# Allegro board 1400916.brd
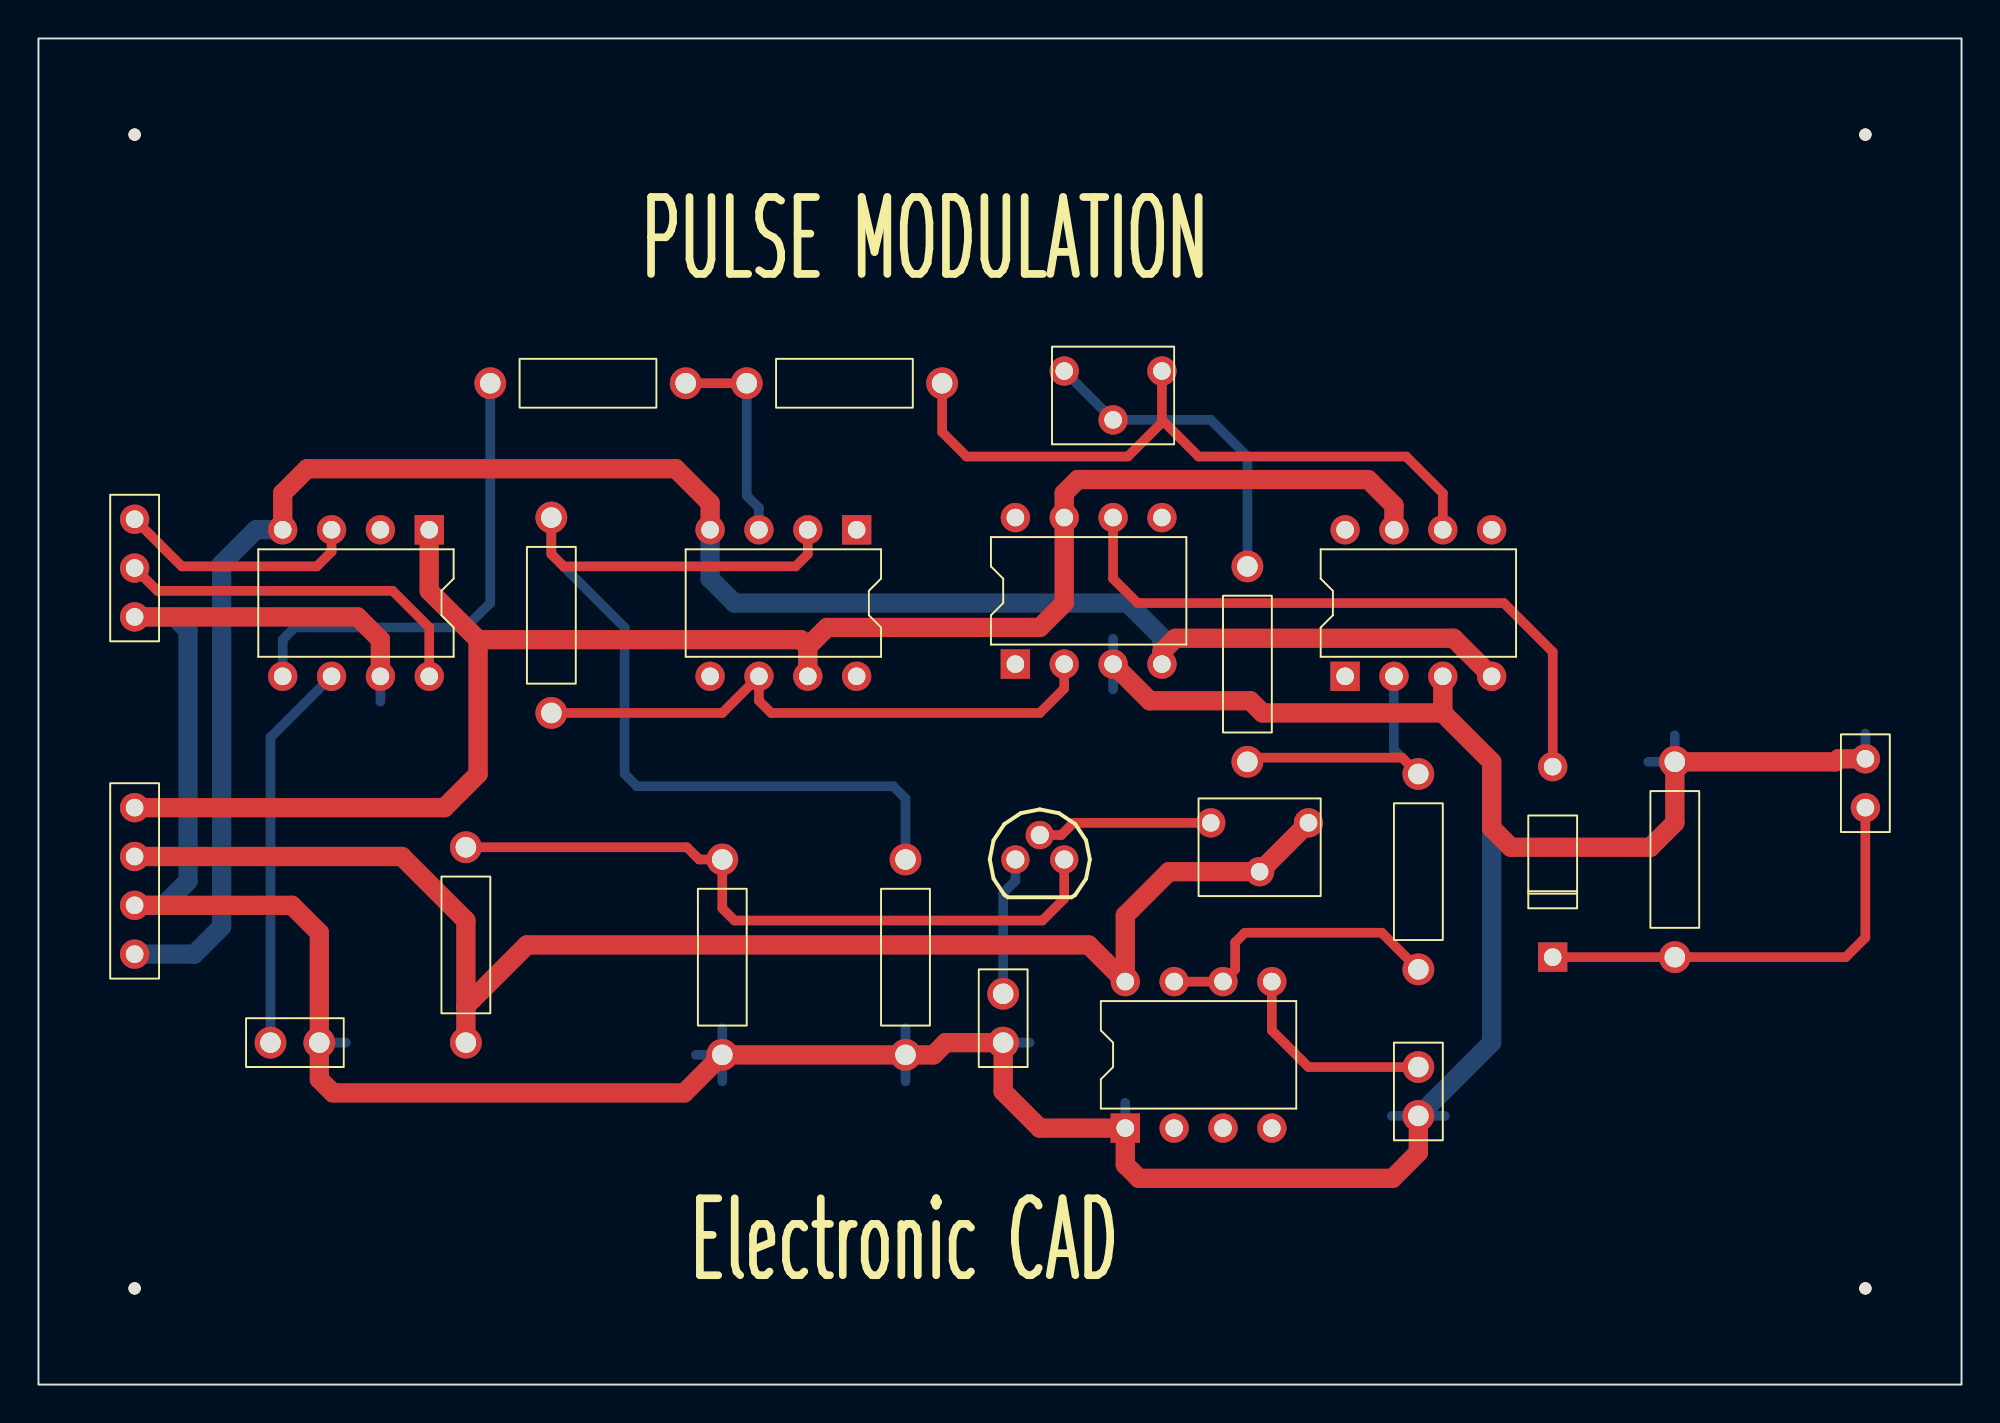
[diagram p0: board, top side]
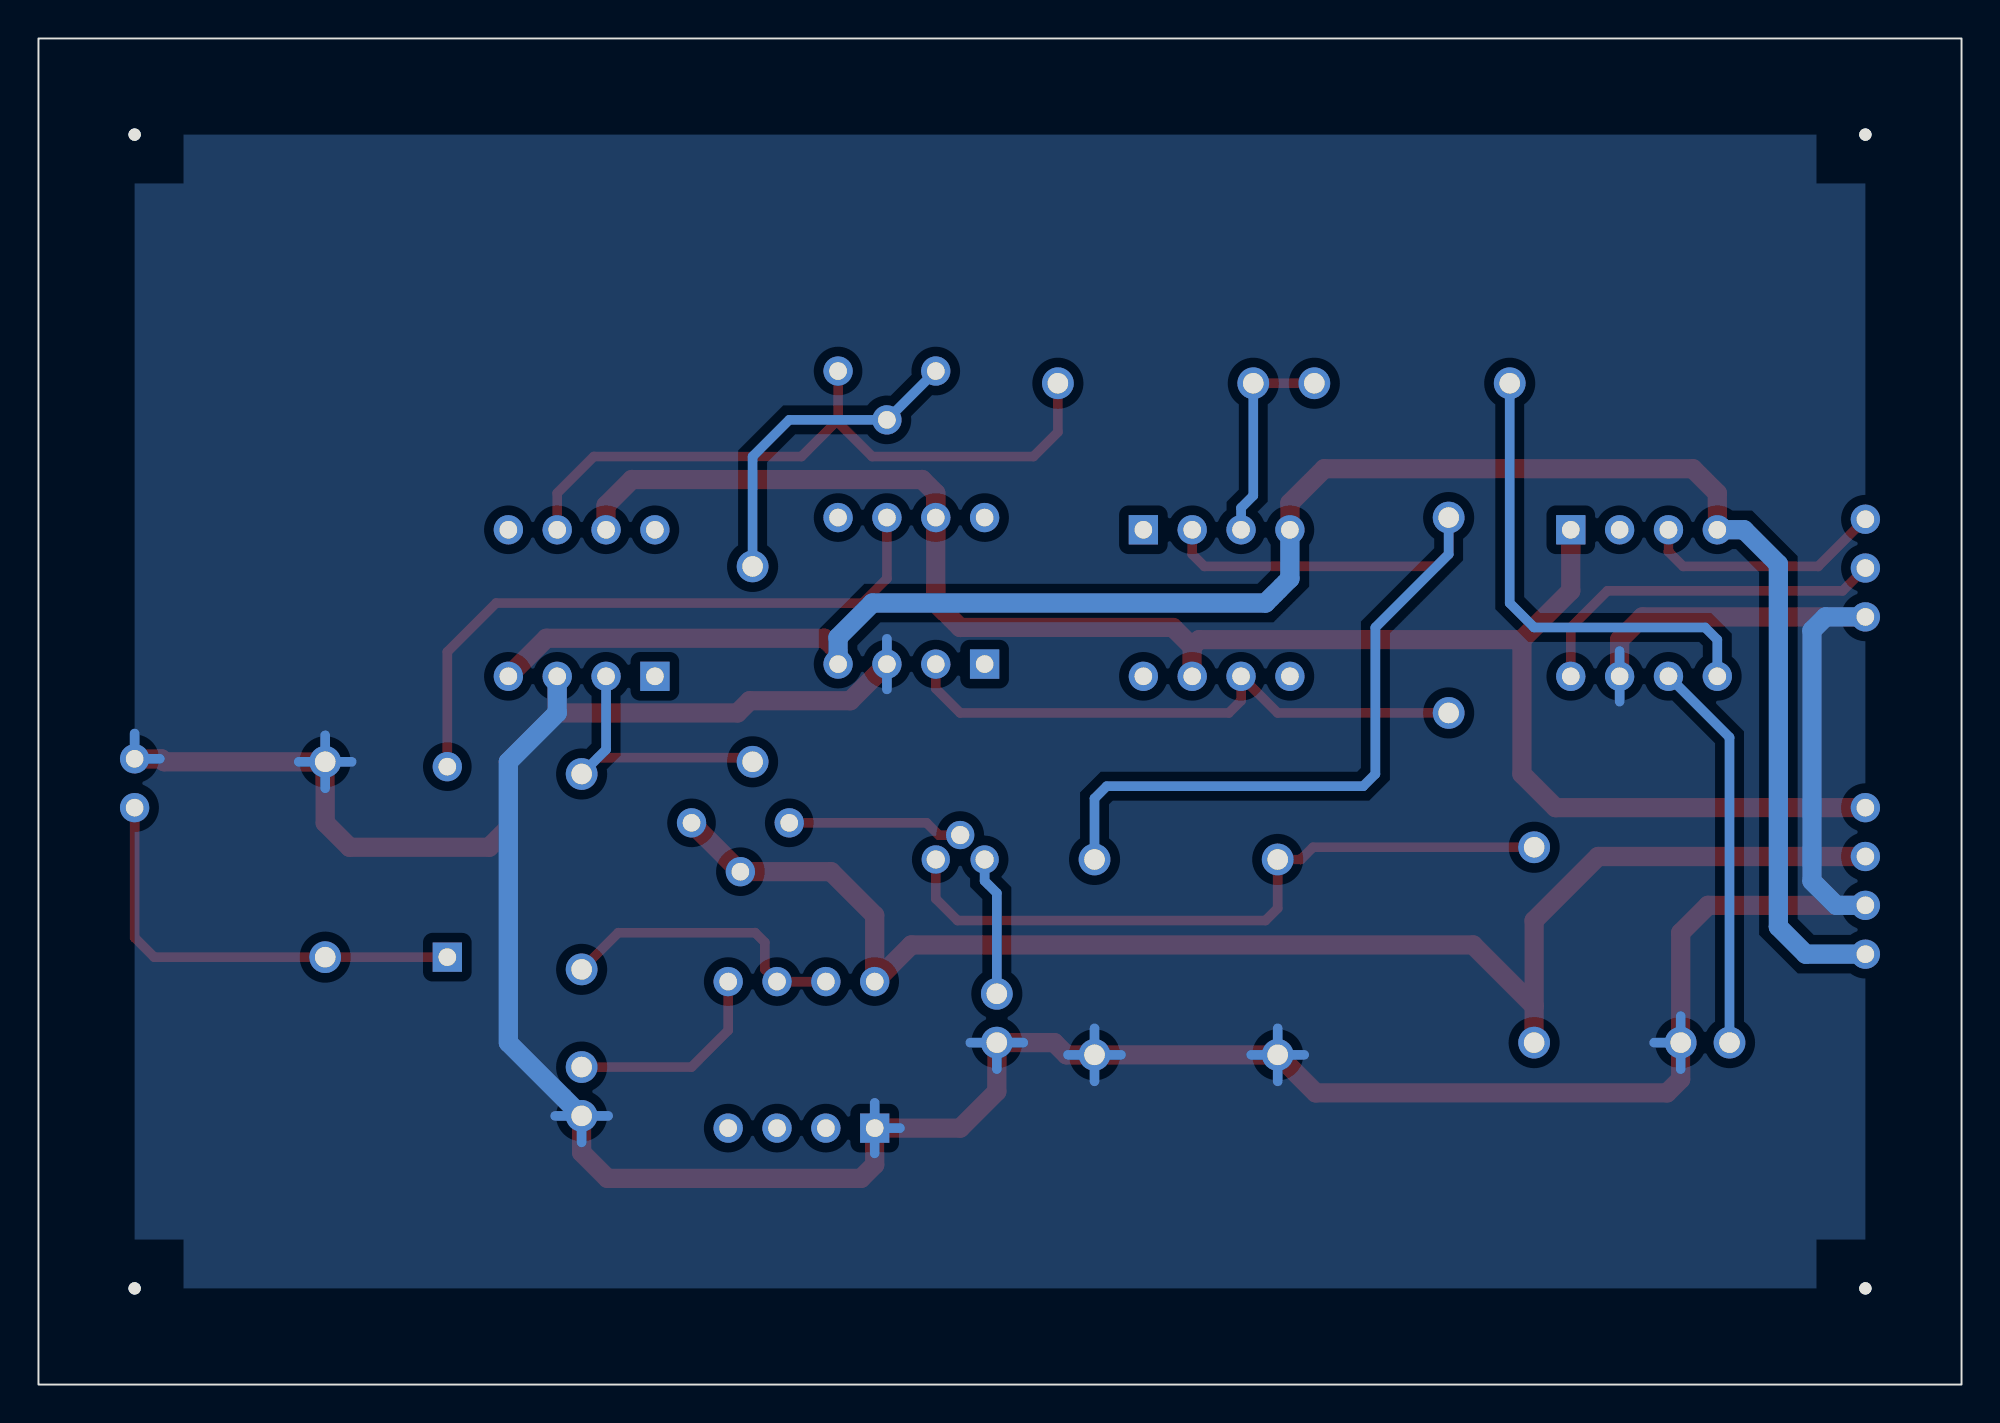
[diagram p1: board, bottom side, seen from below]

Outline 100 x 70 mm; copper layers: TOP, BOTTOM. Coordinates in mm from the lower left corner of the outline.
Outline path: rectangle 0,0 100,70

## Design rules (mm)
constraint set DEFAULT: min track width 0.5

## Placement (name value [footprint] x y rotation side)
C1  0.01uF  [CAPCK05]  50.16 20.32 180 top
C2  0.01uF  [CAPCK05]  71.75 16.51 180 top
C3  0.01uF  [CAPCK05]  12.06 17.78 270 top
D1  1S1588  [DO41]  78.74 22.23 0 top
J1  CON4  [JUMPER4]  5 30 270 top
J2  CON3  [JUMPER3]  5 45 270 top
J3  CON2  [JUMPER2]  95 30 90 top
NOREF  -  [unnamed]  95 5 0 top
NOREF#2  -  [unnamed]  5 65 0 top
NOREF#3  -  [unnamed]  5 5 0 top
NOREF#4  -  [unnamed]  95 65 0 top
Q1  2SA1015  [TO226AB]  50.8 27.3 0 top
R1  560  [RES400]  62.87 32.38 0 top
R2  39K  [RES400]  22.23 27.94 180 top
R3  6.2K  [RES400]  71.75 31.75 180 top
R4  100K  [RES400]  35.56 27.3 180 top
R5  10K  [RES400]  46.99 52.07 90 top
R6  10K  [RES400]  26.67 45.09 180 top
R7  10K  [RES400]  23.5 52.07 270 top
R8  10K  [RES400]  45.09 17.14 0 top
R9  10K  [RES400]  85.09 32.38 180 top
U1  NE555  [DIP8_3]  56.52 13.34 90 top
U2  LF356  [DIP8_3]  67.94 36.83 90 top
U3  LF398  [DIP8_3]  20.32 44.45 270 top
U4  LF356  [DIP8_3]  42.55 44.45 270 top
U5  LF356  [DIP8_3]  50.8 37.47 90 top
VR1  5K  [RESADJ]  60.96 29.21 90 top
VR2  20K  [RESADJ]  53.34 52.7 90 top

## Library data of the parts
C1-C3 = CAP NP: Tolerance: ***; User Part Number: ***
D1 = DIODE
J1 = CON4: User Part Number: ***
J2 = CON3: User Part Number: ***
J3 = CON2: User Part Number: ***
Q1 = 2SA1020
R1-R9 = R: Tolerance: ***; User Part Number: ***
U1 = NE555_2: Tolerance: ***; User Part Number: ***
U2 U4 U5 = LF356_4: Tolerance: ***; User Part Number: ***
U3 = LF356_3: Tolerance: ***; User Part Number: ***
VR1 VR2 = POT: Tolerance: ***; User Part Number: ***

## Footprints (pads in the part's own frame, mm; a bottom-side part is the same pattern mirrored in y, then rotated)
CAPCK05
  round 1.651 hole 1.067: 1(0,0) 2(0,2.54)
DIP8_3
  rect 1.524x1.524 hole 0.914: 1(0,0)
  round 1.524 hole 0.914: 2(0,-2.54) 3(0,-5.08) 4(0,-7.62) 5(7.62,-7.62) 6(7.62,-5.08) 7(7.62,-2.54) 8(7.62,0)
DO41
  rect 1.524x1.524 hole 0.914: 1(0,0)
  round 1.524 hole 0.914: 2(0,9.906)
JUMPER2
  round 1.524 hole 0.914: 1(0,0) 2(2.54,0)
JUMPER3
  round 1.524 hole 0.914: 1(0,0) 2(2.54,0) 3(5.08,0)
JUMPER4
  round 1.524 hole 0.914: 1(0,0) 2(2.54,0) 3(5.08,0) 4(7.62,0)
RES400
  round 1.651 hole 1.067: 1(0,0) 2(0,10.16)
RESADJ
  round 1.524 hole 0.914: 1(0,0) 2(-2.54,-2.54) 3(0,-5.08)
TO226AB
  round 1.473 hole 0.94: 1(0,0) 2(1.27,1.27) 3(2.54,0)
unnamed
  round 0.635 hole 3.175 unplated: (0,0)

## Nets
+5V: J1.2 R2.2 U1.8(VCC) VR1.2(WIPER) VR1.3
+15V: J1.1 U2.7 U3.1 U4.7 U5.7
-15V: J1.4 U2.4(V-) U3.4(V-) U4.4(V-) U5.4(V-)
GND: C1.2 C2.2 C3.2 J1.3 J2.3 J3.2 R4.2 R8.1 R9.1 U1.1 U2.3 U3.7 U5.3
CLOCK: U1.2
SIG_1: R5.1 U2.6 VR2.3
N00908: Q1.3 R2.1 R4.1
N00957: R3.2 U1.6 U1.7
N01010: C1.1 Q1.1(E)
N01067: C2.1 U1.5
N01446: R1.1 R3.1 U2.2
N01463: R1.2 VR2.1 VR2.2(WIPER)
N01623: Q1.2 VR1.1
N01631: J2.1 U3.3
N01710: J2.2 U3.8
N02451: C3.1 U3.6
N02837: R6.1 R8.2 U4.2
N02924: R5.2 R7.2 U4.3
N03004: R7.1 U3.5
N03064: R6.2 U4.6 U5.2
N03937: D1.2 U5.6
N03967: D1.1(K) J3.1 R9.2

Pads without a net: U1 3 4; U2 1 5 8; U3 2; U4 1 5 8; U5 1 5 8

## Routing (per net, layer and track width the routed paths; a pad name or vN(x,y) marks a point on that pad's centre or on a via; arc(x,y) is an arc through that point)
+5V: length 76.3
  TOP w1: J1.2 18.89,27.46 22.23,24.13 22.23,19.68 ; 22.23,19.68 R2.2 ; 22.23,19.68 25.4,22.86 54.61,22.86 U1.8 56.52,24.4 58.78,26.67 VR1.2 VR1.3
+15V: length 90.4
  TOP w1: 22.86,38.73 20.32,41.27 U3.1 ; 22.86,38.73 22.86,31.75 21.11,30 J1.1 ; 22.86,38.73 39.64,38.73 40.01,38.37 ; 40.01,38.37 U4.7 ; 40.01,38.37 41.01,39.37 52.07,39.37 53.34,40.64 U5.7 53.34,46.35 54.05,47.06 69.14,47.06 70.48,45.72 U2.7
-15V: length 102.3
  TOP w1: U3.4 12.7,46.35 13.97,47.62 33.14,47.62 34.92,45.84 34.92,44.45 ; U5.4 58.42,38.1 59.13,38.81 73.59,38.81 U2.4
  BOTTOM w1: U3.4 11.31,44.45 9.53,42.66 9.53,23.8 8.1,22.38 J1.4 ; 34.92,44.45 34.92,41.91 36.2,40.64 56.63,40.64 58.42,38.85 U5.4
GND: length 235.9
  TOP w1: J2.3 16.59,39.92 17.78,38.73 U3.7 ; J1.3 13.18,24.92 14.61,23.5 C3.2 14.61,15.88 15.31,15.17 33.58,15.17 R4.2 R8.1 46.54,17.14 47.17,17.78 C1.2 50.16,15.24 52.07,13.34 U1.1 56.52,11.43 57.22,10.72 70.41,10.72 71.75,12.06 C2.2 ; 73.03,34.92 63.65,34.92 63.02,35.56 57.78,35.56 U5.3 ; 73.03,34.92 75.56,32.38 75.56,28.94 76.56,27.94 83.82,27.94 85.09,29.21 R9.1 93.45,32.38 93.61,32.54 J3.2 ; 73.03,34.92 U2.3
  BOTTOM w0.5: 85.09,31.01 R9.1 ; R9.1 86.47,32.38 ; R9.1 85.09,33.76 ; R9.1 83.71,32.38 ; C3.2 14.61,19.16 ; C3.2 15.98,17.78 ; C3.2 14.61,16.4 ; C2.2 73.13,13.97 ; C2.2 70.38,13.97 ; C2.2 71.75,12.59 ; 17.78,38.15 U3.7 17.78,35.52 ; 50.16,16.4 C1.2 ; C1.2 51.54,17.78 ; C1.2 48.79,17.78 ; 55.88,38.78 U5.3 55.88,36.15 ; U1.1 56.52,14.65 ; U1.1 55.2,13.34 ; U1.1 56.52,12.02 ; 93.69,32.54 J3.2 95,33.85 ; R8.1 46.46,17.14 ; R8.1 45.09,15.77 ; R8.1 43.71,17.14 ; R8.1 45.09,18.52 ; 35.56,15.77 R4.2 ; R4.2 34.18,17.14 ; R4.2 36.94,17.14 ; R4.2 35.56,18.52
  BOTTOM w1: C2.2 75.56,17.78 75.56,32.38 73.03,34.92 U2.3 ; J2.3 7.07,39.92 7.78,39.21 7.78,26.18 6.52,24.92 J1.3
SIG_1: length 36
  TOP w0.5: 58.42,50.16 58.42,50.03 56.65,48.26 48.26,48.26 46.99,49.53 R5.1 ; 58.42,50.16 60.33,48.26 71.12,48.26 73.03,46.35 U2.6 ; 58.42,50.16 VR2.3
N00908: length 36.7
  TOP w0.5: Q1.3 53.34,25.27 52.2,24.13 36.2,24.13 35.56,24.77 R4.1 34.36,27.3 33.72,27.94 R2.1
N00957: length 15.4
  TOP w0.5: R3.2 69.85,23.5 62.73,23.5 62.23,23 62.23,21.59 U1.6 U1.7
N01010: length 7.2
  BOTTOM w0.5: C1.1 50.16,25.56 50.8,26.19 Q1.1
N01067: length 10.9
  TOP w0.5: U1.5 64.14,18.41 66.04,16.51 C2.1
N01446: length 14.9
  TOP w0.5: R1.1 63.08,32.6 70.9,32.6 R3.1
  BOTTOM w0.5: R3.1 70.48,33.02 U2.2
N01463: length 17.1
  BOTTOM w0.5: R1.2 62.87,48.26 60.96,50.16 VR2.2 VR2.1
N01623: length 9.2
  TOP w0.5: Q1.2 53.18,28.57 53.82,29.21 VR1.1
N01631: length 12.7
  TOP w0.5: U3.3 15.24,43.31 14.47,42.55 7.46,42.55 J2.1
N01710: length 19.1
  TOP w0.5: J2.2 6.18,41.27 18.41,41.27 20.32,39.37 U3.8
N02451: length 20.4
  BOTTOM w0.5: U3.6 12.06,33.66 C3.1
N02837: length 50.3
  TOP w0.5: R6.1 26.67,43.18 27.3,42.55 39.37,42.55 40.01,43.18 U4.2
  BOTTOM w0.5: R8.2 45.09,30.48 44.45,31.11 31.11,31.11 30.48,31.75 30.48,39.37 26.67,43.18 R6.1
N02924: length 11.1
  TOP w0.5: R7.2 R5.2
  BOTTOM w0.5: U4.3 37.47,45.59 36.83,46.23 R5.2
N03004: length 24.9
  BOTTOM w0.5: R7.1 23.5,40.64 22.23,39.37 13.34,39.37 12.7,38.73 U3.5
N03064: length 30.8
  TOP w0.5: R6.2 35.56,34.92 U4.6 37.47,35.56 38.1,34.92 52.07,34.92 53.34,36.2 U5.2
N03937: length 33.6
  TOP w0.5: D1.2 78.74,38.1 76.2,40.64 57.15,40.64 55.88,41.91 U5.6
N03967: length 23.4
  TOP w0.5: D1.1 R9.2 93.98,22.23 95,23.25 J3.1

## Copper pours and planes (outline as drawn; the poured copper is in the pictures)
GND on BOTTOM: 5,5 5,65 95,65 95,5

## Text on the board
Ref Des/Silkscreen Top: PULSE MODULATION | Electronic CAD
COMPVAL_TYPE_TOP: FIGURE | FINISHED_SIZE | 0.914 | 0.94 | 1.067 | 3.175 | DRILL CHART: TOP to BOTTOM | ALL UNITS ARE IN MILLIMETERS | PLATED | NON-PLATED | QTY | 57 | 3 | 24 | 4
